# Altium PCB Insole_ver1.PcbDoc (part 2 of 2)
Units mil, origin at the board's own origin, x right, y up, seen from the top; angles counter-clockwise.
Board outline 8634.93 x 10258.5 mil, 2 copper layers (Top Layer, Bottom Layer); 254 components, 50 nets, 823 pads, 0 vias.
Unrouted connection lines stored in the file: 475.
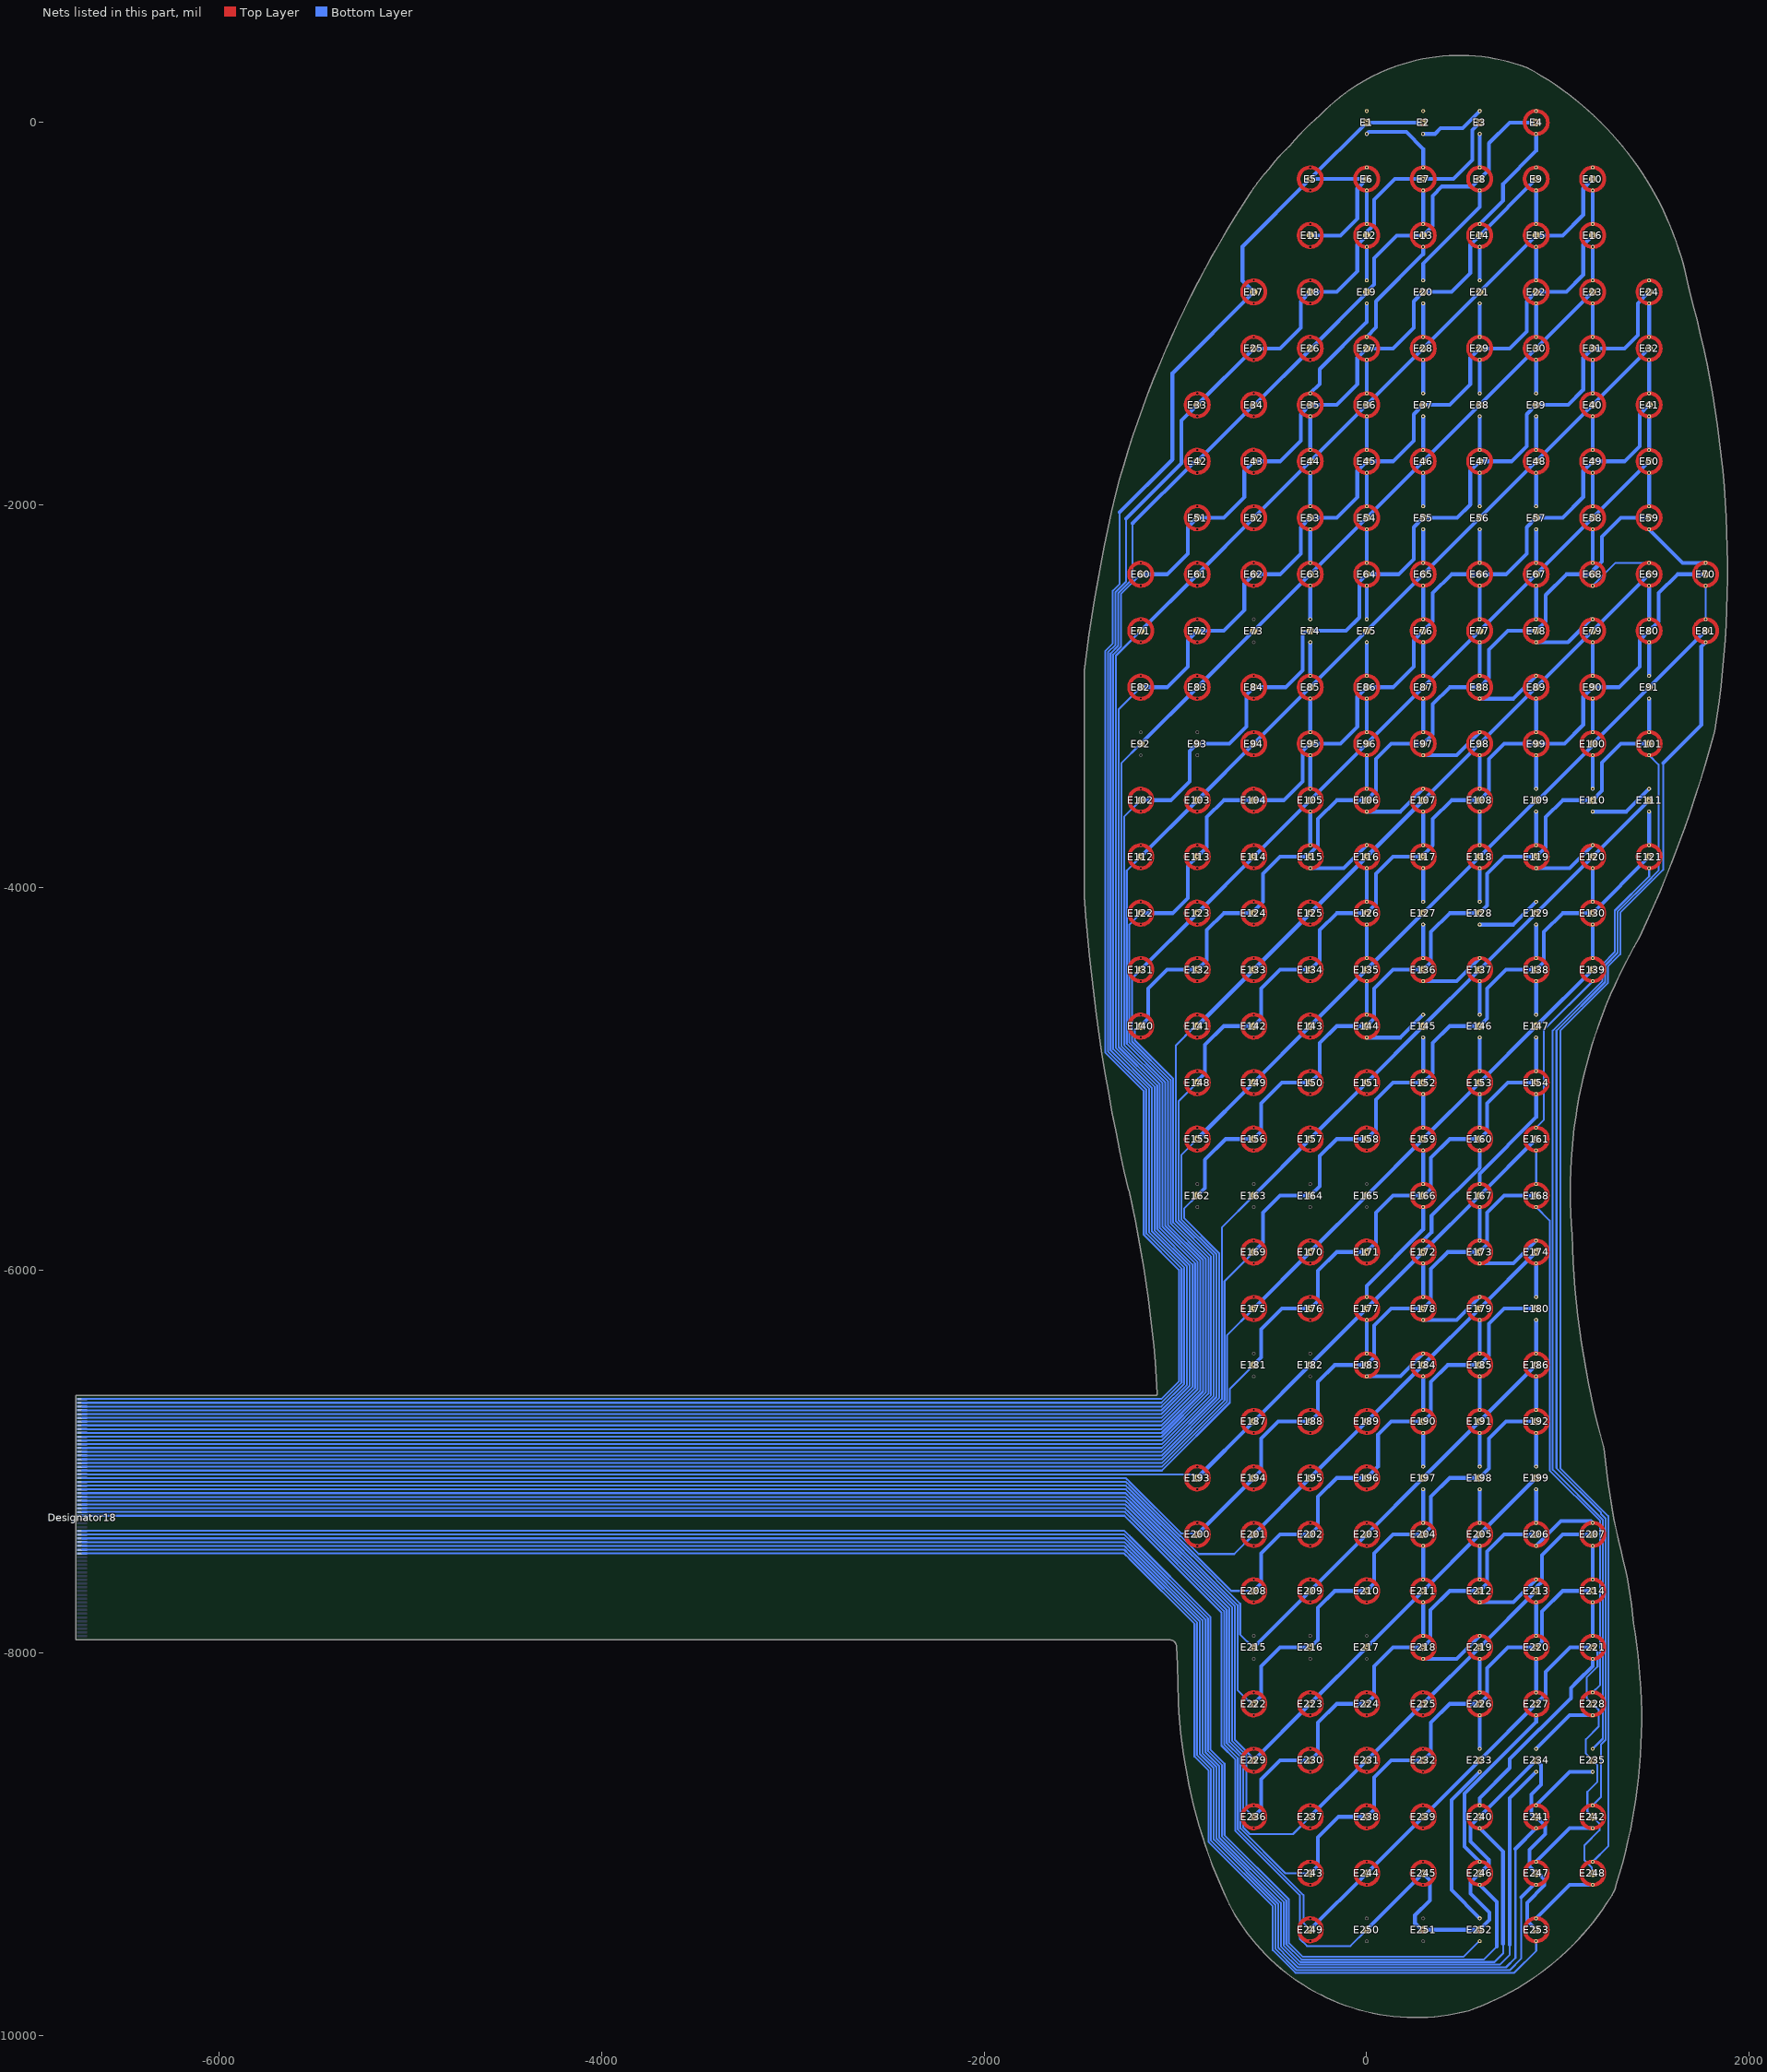
[diagram p2: the nets of this part, all layers, seen from the top]

## Nets (pads, with @x,y where several pads share a name; then routed paths per layer and width w, separated by ;. In a path a pad name is that pad's centre, name@x,y a point inside that pad or via, vN(x,y) a via of type N, cw(c..) or ccw(c..) an arc to the next point about the centre after c; other vN are vias at no path point) (continued)
Col4: Designator18.36 E6.1 E12.1 E19.1 E35.1 E44.1 E53.1 E63.1 E74.1 E85.1 E95.1 E105.1 E115.1 E116.1 E126.1 E135.1 E144.1 E145.1 E152.1 E159.1 E166.1 E177.1 E183.1 E184.1 E190.1 E197.1 E204.1 E211.1 E218.1 E219.1 E226.1 E233.1 E252.1 | length 16681
  Bottom Layer w10: Designator18.36@-6715.55,-7363.19 -4212.6,-7363.19 -1267.07,-7363.19 -1240.16,-7390.1 -1233.85,-7396.41 -816.38,-7813.88 -816.38,-8507.95 -743.67,-8580.66 -743.67,-8953.98 -406.39,-9291.25 -406.39,-9519.26 -335.99,-9589.66 507.09,-9589.66 587.93,-9508.82 E252.1@590.55,-9508.82
  Bottom Layer w19.68: E115.1@-295.28,-3898.58 -120,-3898.58 E116.1@0,-3778.58 ; E115.1@-295.28,-3778.58 E105.1@-295.28,-3603.31 ; E105.1@-295.28,-3483.31 E95.1@-295.28,-3308.03 ; E95.1@-295.28,-3188.03 E85.1@-295.28,-3012.76 ; E85.1@-295.28,-2892.76 E74.1@-295.28,-2717.48 ; E74.1@-295.28,-2597.48 E63.1@-295.28,-2422.2 ; E63.1@-295.28,-2302.2 E53.1@-295.28,-2126.93 ; E53.1@-295.28,-2006.93 E44.1@-295.28,-1831.65 ; E44.1@-295.28,-1711.65 E35.1@-295.28,-1536.38 ; E35.1@-295.28,-1416.38 -246.06,-1367.17 -246.06,-1289.37 0,-1043.31 E19.1@0,-945.83 ; E183.1@0,-6556.06 175.28,-6556.06 E184.1@295.28,-6436.06 ; E183.1@0,-6436.06 E177.1@0,-6260.79 ; E177.1@0,-6140.79 0,-6082.68 295.28,-5787.4 E166.1@295.28,-5670.24 ; E144.1@0,-4784.41 175.28,-4784.41 E145.1@295.28,-4664.41 ; E144.1@0,-4664.41 E135.1@0,-4489.13 ; E135.1@0,-4369.13 E126.1@0,-4193.86 ; E126.1@0,-4073.86 E116.1@0,-3898.58 ; E19.1@0,-825.83 E12.1@0,-650.55 ; E12.1@0,-530.55 E6.1@0,-355.28 ; E218.1@295.28,-8032.44 470.55,-8032.44 E219.1@590.55,-7912.44 ; E218.1@295.28,-7912.44 E211.1@295.28,-7737.17 ; E211.1@295.28,-7617.17 E204.1@295.28,-7441.89 ; E204.1@295.28,-7321.89 E197.1@295.28,-7146.61 ; E197.1@295.28,-7026.61 E190.1@295.28,-6851.34 ; E190.1@295.28,-6731.34 E184.1@295.28,-6556.06 ; E166.1@295.28,-5550.24 E159.1@295.28,-5374.96 ; E159.1@295.28,-5254.96 E152.1@295.28,-5079.69 ; E152.1@295.28,-4959.69 E145.1@295.28,-4784.41 ; E252.1@590.55,-9388.82 442.91,-9241.18 442.91,-8770.63 E233.1@590.55,-8622.99 ; E233.1@590.55,-8502.99 E226.1@590.55,-8327.72 ; E226.1@590.55,-8207.72 E219.1@590.55,-8032.44
Col5: Designator18.37 E1.1 E7.1 E13.1 E27.1 E36.1 E45.1 E54.1 E64.1 E75.1 E86.1 E96.1 E106.1 E107.1 E117.1 E127.1 E136.1 E137.1 E146.1 E153.1 E160.1 E172.1 E178.1 E179.1 E185.1 E191.1 E198.1 E205.1 E212.1 E213.1 E220.1 E227.1 E246.1 | length 17445.6
  Bottom Layer w10: Designator18.37@-6715.55,-7382.87 -4212.6,-7382.87 -1267.19,-7382.87 -1240.16,-7409.9 -1233.85,-7416.21 -830.38,-7819.68 -830.38,-8513.75 -757.67,-8586.46 -757.67,-8959.78 -420.72,-9296.73 -420.72,-9524.73 -341.79,-9603.66 612.87,-9603.66 679.13,-9537.4
  Bottom Layer w19.68: E106.1@0,-3603.31 175.28,-3603.31 E107.1@295.28,-3483.31 ; E106.1@0,-3483.31 E96.1@0,-3308.03 ; E96.1@0,-3188.03 E86.1@0,-3012.76 ; E86.1@0,-2892.76 E75.1@0,-2717.48 ; E75.1@0,-2597.48 E64.1@0,-2422.2 ; E64.1@0,-2302.2 E54.1@0,-2126.93 ; E54.1@0,-2006.93 E45.1@0,-1831.65 ; E45.1@0,-1711.65 E36.1@0,-1536.38 ; E36.1@0,-1416.38 E27.1@0,-1241.1 ; E27.1@0,-1121.1 49.21,-1071.89 49.21,-935.04 295.28,-688.98 E13.1@295.28,-650.55 ; E1.1@0,-60 10.79,-49.21 206.69,-49.21 295.28,-137.8 E7.1@295.28,-235.28 ; E178.1@295.28,-6260.79 470.55,-6260.79 E179.1@590.55,-6140.79 ; E178.1@295.28,-6140.79 E172.1@295.28,-5965.51 ; E172.1@295.28,-5845.51 338.58,-5802.2 338.58,-5716.54 590.55,-5464.57 E160.1@590.55,-5374.96 ; E136.1@295.28,-4489.13 470.55,-4489.13 E137.1@590.55,-4369.13 ; E136.1@295.28,-4369.13 E127.1@295.28,-4193.86 ; E127.1@295.28,-4073.86 E117.1@295.28,-3898.58 ; E117.1@295.28,-3778.58 E107.1@295.28,-3603.31 ; E13.1@295.28,-530.55 E7.1@295.28,-355.28 ; E246.1@590.55,-9213.54 679.13,-9302.13 679.13,-9537.4 ; E246.1@590.55,-9093.54 511.81,-9014.8 511.81,-8736.86 885.83,-8362.85 E227.1@885.83,-8327.72 ; E212.1@590.55,-7737.17 765.83,-7737.17 E213.1@885.83,-7617.17 ; E212.1@590.55,-7617.17 E205.1@590.55,-7441.89 ; E205.1@590.55,-7321.89 E198.1@590.55,-7146.61 ; E198.1@590.55,-7026.61 E191.1@590.55,-6851.34 ; E191.1@590.55,-6731.34 E185.1@590.55,-6556.06 ; E185.1@590.55,-6436.06 E179.1@590.55,-6260.79 ; E160.1@590.55,-5254.96 E153.1@590.55,-5079.69 ; E153.1@590.55,-4959.69 E146.1@590.55,-4784.41 ; E146.1@590.55,-4664.41 E137.1@590.55,-4489.13 ; E227.1@885.83,-8207.72 E220.1@885.83,-8032.44 ; E220.1@885.83,-7912.44 E213.1@885.83,-7737.17
Col6: Designator18.38 E2.1 E3.1 E8.1 E20.1 E28.1 E37.1 E46.1 E55.1 E65.1 E76.1 E87.1 E97.1 E98.1 E108.1 E118.1 E128.1 E129.1 E138.1 E147.1 E154.1 E167.1 E173.1 E174.1 E180.1 E186.1 E192.1 E199.1 E206.1 E207.1 E214.1 E221.1 E240.1 | length 17790.8
  Bottom Layer w10: Designator18.38@-6715.55,-7402.56 -6584.24,-7402.56 -4212.6,-7402.56 -1267.3,-7402.56 -1240.16,-7429.7 -1233.85,-7436.01 -844.38,-7825.48 -844.38,-8519.55 -771.67,-8592.26 -771.67,-8965.58 -434.72,-9302.53 -434.72,-9530.53 -347.59,-9617.66 667.77,-9617.66 712.6,-9572.83 712.6,-9521.65 ; 1062.99,-7313.94 1062.99,-7312.99
  Bottom Layer w19.68: E97.1@295.28,-3308.03 470.55,-3308.03 E98.1@590.55,-3188.03 ; E97.1@295.28,-3188.03 E87.1@295.28,-3012.76 ; E87.1@295.28,-2892.76 E76.1@295.28,-2717.48 ; E76.1@295.28,-2597.48 E65.1@295.28,-2422.2 ; E65.1@295.28,-2302.2 E55.1@295.28,-2126.93 ; E55.1@295.28,-2006.93 E46.1@295.28,-1831.65 ; E46.1@295.28,-1711.65 E37.1@295.28,-1536.38 ; E37.1@295.28,-1416.38 E28.1@295.28,-1241.1 ; E28.1@295.28,-1121.1 E20.1@295.28,-945.83 ; E20.1@295.28,-825.83 295.28,-738.19 590.55,-442.91 E8.1@590.55,-355.28 ; E2.1@295.28,-60 356.22,-60 386.69,-29.53 501.02,-29.53 E3.1@590.55,60 ; E240.1@590.55,-8918.27 712.6,-9040.31 712.6,-9521.65 ; E240.1@590.55,-8798.27 590.55,-8759.84 747.6,-8602.79 747.6,-8555.55 901.57,-8401.57 904.81,-8401.57 1067.62,-8238.77 1067.62,-8184.35 1102.36,-8149.61 1181.1,-8070.87 E221.1@1181.1,-8032.44 ; E173.1@590.55,-5965.51 765.83,-5965.51 E174.1@885.83,-5845.51 ; E173.1@590.55,-5845.51 E167.1@590.55,-5670.24 ; E167.1@590.55,-5550.24 590.55,-5496.06 885.83,-5200.79 E154.1@885.83,-5079.69 ; E128.1@590.55,-4193.86 765.83,-4193.86 E129.1@885.83,-4073.86 ; E128.1@590.55,-4073.86 E118.1@590.55,-3898.58 ; E118.1@590.55,-3778.58 E108.1@590.55,-3603.31 ; E108.1@590.55,-3483.31 E98.1@590.55,-3308.03 ; E8.1@590.55,-235.28 E3.1@590.55,-60 ; E206.1@885.83,-7441.89 1014.72,-7312.99 1062.99,-7312.99 1172.2,-7312.99 E207.1@1181.1,-7321.89 ; E206.1@885.83,-7321.89 E199.1@885.83,-7146.61 ; E199.1@885.83,-7026.61 E192.1@885.83,-6851.34 ; E192.1@885.83,-6731.34 E186.1@885.83,-6556.06 ; E186.1@885.83,-6436.06 E180.1@885.83,-6260.79 ; E180.1@885.83,-6140.79 E174.1@885.83,-5965.51 ; E154.1@885.83,-4959.69 E147.1@885.83,-4784.41 ; E147.1@885.83,-4664.41 E138.1@885.83,-4489.13 ; E138.1@885.83,-4369.13 E129.1@885.83,-4193.86 ; E221.1@1181.1,-7912.44 E214.1@1181.1,-7737.17 ; E214.1@1181.1,-7617.17 E207.1@1181.1,-7441.89
Col7: Designator18.39 E4.1 E14.1 E21.1 E29.1 E38.1 E47.1 E56.1 E66.1 E77.1 E88.1 E89.1 E99.1 E109.1 E119.1 E120.1 E130.1 E139.1 E161.1 E168.1 E228.1 E234.1 | length 17857.8
  Bottom Layer w10: Designator18.39@-6715.55,-7422.24 -4212.6,-7422.24 -1267.42,-7422.24 -1240.16,-7449.5 -1233.85,-7455.81 -858.38,-7831.28 -858.38,-8525.35 -785.67,-8598.06 -785.67,-8971.37 -448.8,-9308.24 -448.8,-9536.25 -353.39,-9631.66 695.77,-9631.66 748.03,-9579.4 748.03,-9527.56 ; E168.1@885.83,-5670.24 956.69,-5741.1 956.69,-7047.24 1220.47,-7311.02 1220.47,-8168.35 E228.1@1181.1,-8207.72 ; E168.1@885.83,-5550.24 E161.1@885.83,-5374.96 ; E161.1@885.83,-5254.96 925.2,-5215.59 925.2,-4745.04 E139.1@1181.1,-4489.13
  Bottom Layer w19.68: E88.1@590.55,-3012.76 765.83,-3012.76 E89.1@885.83,-2892.76 ; E88.1@590.55,-2892.76 E77.1@590.55,-2717.48 ; E77.1@590.55,-2597.48 E66.1@590.55,-2422.2 ; E66.1@590.55,-2302.2 E56.1@590.55,-2126.93 ; E56.1@590.55,-2006.93 E47.1@590.55,-1831.65 ; E47.1@590.55,-1711.65 E38.1@590.55,-1536.38 ; E38.1@590.55,-1416.38 E29.1@590.55,-1241.1 ; E29.1@590.55,-1121.1 E21.1@590.55,-945.83 ; E21.1@590.55,-825.83 E14.1@590.55,-650.55 ; E14.1@590.55,-530.55 712.6,-408.5 712.6,-320.87 885.83,-147.64 E4.1@885.83,-60 ; 748.03,-9527.56 748.03,-8760.79 E234.1@885.83,-8622.99 ; E234.1@885.83,-8502.99 1061.1,-8327.72 E228.1@1181.1,-8327.72 ; E119.1@885.83,-3898.58 1061.1,-3898.58 E120.1@1181.1,-3778.58 ; E119.1@885.83,-3778.58 E109.1@885.83,-3603.31 ; E109.1@885.83,-3483.31 E99.1@885.83,-3308.03 ; E99.1@885.83,-3188.03 E89.1@885.83,-3012.76 ; E139.1@1181.1,-4369.13 E130.1@1181.1,-4193.86 ; E130.1@1181.1,-4073.86 E120.1@1181.1,-3898.58
Col8: Designator18.40 E9.1 E15.1 E22.1 E30.1 E39.1 E48.1 E57.1 E67.1 E78.1 E79.1 E90.1 E100.1 E110.1 E111.1 E121.1 E235.1 E241.1 | length 18014
  Bottom Layer w10: Designator18.40@-6715.55,-7441.93 -4212.6,-7441.93 -1267.53,-7441.93 -1240.16,-7469.3 -1233.85,-7475.61 -872.38,-7837.08 -872.38,-8531.15 -799.67,-8603.86 -799.67,-8977.17 -462.8,-9314.04 -462.8,-9542.04 -436.99,-9567.86 -436.99,-9569.57 -360.91,-9645.66 728.13,-9645.66 777.56,-9596.23 777.56,-9026.54 ; E235.1@1181.1,-8502.99 1234.47,-8449.62 1234.47,-7305.22 972.44,-7043.19 972.44,-4748.03 1232.28,-4488.19 1232.28,-4401.46 1297.02,-4336.72 1297.02,-4120.3 1476.38,-3940.94 E121.1@1476.38,-3898.58
  Bottom Layer w19.68: 777.56,-9026.54 E241.1@885.83,-8918.27 ; E241.1@885.83,-8798.27 1061.1,-8622.99 E235.1@1181.1,-8622.99 ; E78.1@885.83,-2717.48 1052.2,-2717.48 1172.2,-2597.48 E79.1@1181.1,-2597.48 ; E78.1@885.83,-2597.48 E67.1@885.83,-2422.2 ; E67.1@885.83,-2302.2 E57.1@885.83,-2126.93 ; E57.1@885.83,-2006.93 E48.1@885.83,-1831.65 ; E48.1@885.83,-1711.65 E39.1@885.83,-1536.38 ; E39.1@885.83,-1416.38 E30.1@885.83,-1241.1 ; E30.1@885.83,-1121.1 E22.1@885.83,-945.83 ; E22.1@885.83,-825.83 E15.1@885.83,-650.55 ; E15.1@885.83,-530.55 E9.1@885.83,-355.28 ; E110.1@1181.1,-3603.31 1356.38,-3603.31 E111.1@1476.38,-3483.31 ; E110.1@1181.1,-3483.31 E100.1@1181.1,-3308.03 ; E100.1@1181.1,-3188.03 E90.1@1181.1,-3012.76 ; E90.1@1181.1,-2892.76 E79.1@1181.1,-2717.48 ; E121.1@1476.38,-3778.58 E111.1@1476.38,-3603.31
Col9: Designator18.41 E10.1 E16.1 E23.1 E31.1 E40.1 E49.1 E58.1 E68.1 E69.1 E80.1 E91.1 E101.1 E242.1 E247.1 | length 17975.5
  Bottom Layer w10: Designator18.41@-6715.55,-7461.61 -4212.6,-7461.61 -1267.64,-7461.61 -1240.16,-7489.1 -1233.85,-7495.41 -886.38,-7842.88 -886.38,-8536.95 -813.67,-8609.66 -813.67,-8982.97 -476.8,-9319.84 -476.8,-9549.56 -366.7,-9659.66 747.82,-9659.66 807.09,-9600.39 807.09,-9279.53 ; 871.88,-9214.73 884.64,-9214.73 E247.1@885.83,-9213.54 ; E242.1@1181.1,-8798.27 1224.41,-8754.96 1224.41,-8479.48 1248.47,-8455.42 1248.47,-7299.43 1224.41,-7275.36 1224.41,-7267.72 992.13,-7035.43 992.13,-4748.15 1246.28,-4493.99 1246.28,-4407.26 1311.02,-4342.52 1311.02,-4126.1 1490.38,-3946.74 1490.38,-3946.63 1525.37,-3911.64 1525.37,-3357.02 E101.1@1476.38,-3308.03 ; E68.1@1181.1,-2422.2 1301.1,-2302.2 E69.1@1476.38,-2302.2
  Bottom Layer w19.68: 807.09,-9279.53 871.88,-9214.73 ; E247.1@885.83,-9093.54 1061.1,-8918.27 E242.1@1181.1,-8918.27 ; E68.1@1181.1,-2302.2 E58.1@1181.1,-2126.93 ; E58.1@1181.1,-2006.93 E49.1@1181.1,-1831.65 ; E49.1@1181.1,-1711.65 E40.1@1181.1,-1536.38 ; E40.1@1181.1,-1416.38 E31.1@1181.1,-1241.1 ; E31.1@1181.1,-1121.1 E23.1@1181.1,-945.83 ; E23.1@1181.1,-825.83 E16.1@1181.1,-650.55 ; E16.1@1181.1,-530.55 E10.1@1181.1,-355.28 ; E101.1@1476.38,-3188.03 E91.1@1476.38,-3012.76 ; E91.1@1476.38,-2892.76 E80.1@1476.38,-2717.48 ; E80.1@1476.38,-2597.48 E69.1@1476.38,-2422.2
Col10: Designator18.42 E24.1 E32.1 E41.1 E50.1 E59.1 E70.1 E81.1 E248.1 E253.1 | length 17807.5
  Bottom Layer w10: Designator18.42@-6715.55,-7481.3 -4212.6,-7481.3 -1267.76,-7481.3 -1240.16,-7508.9 -1233.85,-7515.21 -900.38,-7848.68 -900.38,-8542.74 -827.67,-8615.46 -827.67,-8988.77 -490.8,-9325.64 -490.8,-9555.36 -372.5,-9673.66 771.22,-9673.66 885.83,-9559.06 E253.1@885.83,-9508.82 ; E248.1@1181.1,-9093.54 1262.47,-9012.17 1262.47,-7285.98 1011.81,-7035.32 1011.81,-4748.26 1260.28,-4499.79 1260.28,-4413.06 1325.02,-4348.32 1325.02,-4131.9 1549.21,-3907.71 1549.21,-3348.43 ; E81.1@1771.65,-2597.48 E70.1@1771.65,-2422.2
  Bottom Layer w19.68: E253.1@885.83,-9388.82 1061.1,-9213.54 E248.1@1181.1,-9213.54 ; E59.1@1476.38,-2126.93 1651.65,-2302.2 E70.1@1771.65,-2302.2 ; E59.1@1476.38,-2006.93 E50.1@1476.38,-1831.65 ; E50.1@1476.38,-1711.65 E41.1@1476.38,-1536.38 ; E41.1@1476.38,-1416.38 E32.1@1476.38,-1241.1 ; E32.1@1476.38,-1121.1 E24.1@1476.38,-945.83 ; 1549.21,-3348.43 1749.02,-3148.62 1749.02,-2740.12 E81.1@1771.65,-2717.48
Col11: 
Col12: 
Col13: 
Col14: 
Col15: 
Col16: 
Col17: 
Col18: 
Row1: Designator18.1 E1.0 E2.0 E5.0 E6.0 E11.0 E17.0 | length 14229.3
  Bottom Layer w10: Designator18.1@-6715.55,-6674.21 -4212.6,-6674.21 -1073.77,-6674.21 -981.65,-6582.09 -981.65,-5998.66 -1165.35,-5814.96 -1165.35,-5064.24 -1367.02,-4862.57 -1367.02,-4857.39 -1367.02,-2764.21 -1327.21,-2724.39 -1327.21,-2448.92 -1291.34,-2413.04 -1291.34,-2037.4
  Bottom Layer w19.68: -1291.34,-2037.4 -1015.75,-1761.81 -1015.75,-1311.02 E17.0@-590.55,-885.83 -649.61,-826.77 -649.61,-649.61 E5.0@-295.28,-295.28 E1.0@0,0 E2.0@295.28,0 ; E11.0@-295.28,-590.55 -137.8,-590.55 -49.21,-501.97 -49.21,-344.49 E6.0@0,-295.28
  Bottom Layer w20: E5.0@-295.28,-295.28 E6.0@0,-295.28
Row2: Designator18.2 E3.0 E7.0 E12.0 E18.0 E25.0 E33.0 | length 13679.3
  Bottom Layer w10: Designator18.2@-6715.55,-6693.9 -4212.6,-6693.9 -1240.16,-6693.9 -1233.85,-6693.9 -1073.5,-6693.9 -967.65,-6588.05 -967.65,-5992.86 -1151.35,-5809.16 -1151.35,-5058.45 -1353.02,-4856.78 -1353.02,-4851.7 -1353.02,-2770.01 -1313.21,-2730.19 -1313.21,-2454.72 -1257.87,-2399.38 -1257.87,-2071.85
  Bottom Layer w19.68: -1257.87,-2071.85 -968.5,-1782.48 -968.5,-1559.06 E33.0@-885.83,-1476.38 E25.0@-590.55,-1181.1 -452.76,-1181.1 -344.49,-1072.83 -344.49,-935.04 E18.0@-295.28,-885.83 -157.48,-885.83 -49.21,-777.56 -49.21,-639.76 E12.0@0,-590.55 ; E12.0@3.77,-586.78 3.77,-568.77 39.37,-533.16 39.37,-403.54 147.64,-295.28 E7.0@295.28,-295.28 452.76,-295.28 551.18,-196.85 551.18,-39.37 E3.0@590.55,0
Row3: Designator18.3 E4.0 E8.0 E13.0 E19.0 E26.0 E34.0 E42.0 | length 13750.7
  Bottom Layer w10: Designator18.3@-6715.55,-6713.58 -4212.6,-6713.58 -1240.16,-6713.58 -1233.85,-6713.58 -1073.39,-6713.58 -953.65,-6593.85 -953.65,-5987.06 -1137.35,-5803.36 -1137.35,-5052.65 -1339.02,-4850.98 -1339.02,-4842.08 -1339.02,-2775.8 -1299.21,-2735.99 -1299.21,-2460.52 -1223.43,-2384.73 -1223.43,-2096.46 ; E42.0@-904.24,-1777.27 E42.0@-891.45,-1777.27
  Bottom Layer w19.68: -1223.43,-2096.46 E42.0@-904.24,-1777.27 ; E42.0@-893.58,-1779.41 E34.0@-590.55,-1476.38 ; E34.0@-588.05,-1478.88 -292.78,-1183.6 E19.0@2.5,-888.33 ; E19.0@0,-885.83 39.37,-846.46 39.37,-708.66 157.48,-590.55 E13.0@295.28,-590.55 344.49,-541.34 344.49,-383.86 393.7,-334.65 551.18,-334.65 E8.0@590.55,-295.28 639.76,-246.06 639.76,-108.27 748.03,0 E4.0@885.83,0
Row4: Designator18.4 E9.0 E14.0 E20.0 E27.0 E35.0 E43.0 E51.0 E60.0 | length 13701.1
  Bottom Layer w10: Designator18.4@-6715.55,-6733.27 -6593.5,-6733.27 -4212.6,-6733.27 -1240.16,-6733.27 -1233.85,-6733.27 -1073.27,-6733.27 -939.65,-6599.65 -939.65,-5981.26 -1123.35,-5797.56 -1123.35,-5046.85 -1325.02,-4845.18 -1325.02,-2781.6 -1285.21,-2741.79 -1285.21,-2466.31 E60.0@-1181.1,-2362.2
  Bottom Layer w19.68: E60.0@-1181.1,-2362.2 -1043.31,-2362.2 -935.04,-2253.94 -935.04,-2116.14 E51.0@-885.83,-2066.93 -748.03,-2066.93 -639.76,-1958.66 -639.76,-1820.87 E43.0@-590.55,-1771.65 -452.76,-1771.65 -344.49,-1663.39 -344.49,-1525.59 E35.0@-295.28,-1476.38 -157.48,-1476.38 -49.21,-1368.11 -49.21,-1230.32 E27.0@0,-1181.1 137.8,-1181.1 246.06,-1072.83 246.06,-935.04 E20.0@295.28,-885.83 442.91,-885.83 541.34,-787.4 541.34,-639.76 E14.0@590.55,-590.55 E9.0@885.83,-295.28
Row5: Designator18.5 E10.0 E15.0 E21.0 E28.0 E36.0 E44.0 E52.0 E61.0 E71.0 | length 13433.8
  Bottom Layer w10: Designator18.5@-6715.55,-6752.95 -6593.5,-6752.95 -4212.6,-6752.95 -1240.16,-6752.95 -1233.85,-6752.95 -1073.16,-6752.95 -925.65,-6605.44 -925.65,-5975.47 -1109.35,-5791.77 -1109.35,-5041.05 -1310.6,-4839.8 -1310.6,-4835.07 -1311.02,-4834.65 -1311.02,-2787.4 E71.0@-1181.1,-2657.48 ; 871.83,-604.55 E15.0@891.63,-604.55
  Bottom Layer w19.68: E71.0@-1181.1,-2657.48 E61.0@-885.83,-2362.2 E52.0@-590.55,-2066.93 E44.0@-295.28,-1771.65 E36.0@0,-1476.38 E28.0@295.28,-1181.1 871.83,-604.55 ; E15.0@885.83,-590.55 1023.62,-590.55 1131.89,-482.28 1131.89,-344.49 E10.0@1181.1,-295.28
Row6: Designator18.6 E16.0 E22.0 E29.0 E37.0 E45.0 E53.0 E62.0 E72.0 E82.0 | length 13746
  Bottom Layer w10: Designator18.6@-6715.55,-6772.64 -6593.5,-6772.64 -4212.6,-6772.64 -1240.16,-6772.64 -1233.85,-6772.64 -1073.05,-6772.64 -911.65,-6611.24 -911.65,-5969.67 -1095.35,-5785.97 -1095.35,-5035.25 -1296.6,-4834.01 -1296.6,-3343.73 -1296.6,-3068.25 E82.0@-1181.1,-2952.76
  Bottom Layer w19.68: E82.0@-1181.1,-2952.76 -1043.31,-2952.76 -935.04,-2844.49 -935.04,-2706.69 E72.0@-885.83,-2657.48 -748.03,-2657.48 -639.76,-2549.21 -639.76,-2411.42 E62.0@-590.55,-2362.2 -452.76,-2362.2 -344.49,-2253.94 -344.49,-2116.14 E53.0@-295.28,-2066.93 -157.48,-2066.93 -49.21,-1958.66 -49.21,-1820.87 E45.0@0,-1771.65 137.8,-1771.65 246.06,-1663.39 246.06,-1525.59 E37.0@295.28,-1476.38 433.07,-1476.38 541.34,-1368.11 541.34,-1230.32 E29.0@590.55,-1181.1 748.03,-1181.1 836.61,-1092.52 836.61,-935.04 E22.0@885.83,-885.83 1043.31,-885.83 1131.89,-797.24 1131.89,-639.76 E16.0@1181.1,-590.55
Row7: Designator18.7 E23.0 E30.0 E38.0 E46.0 E54.0 E63.0 E73.0 E83.0 E92.0 | length 12801.7
  Bottom Layer w10: Designator18.7@-6715.55,-6792.32 -4212.6,-6792.32 -1240.16,-6792.32 -1233.85,-6792.32 -1072.93,-6792.32 -897.65,-6617.04 -897.65,-5963.87 -1081.35,-5780.17 -1081.35,-5029.45 -1282.6,-4828.21 -1282.6,-4175.96 -1282.6,-3349.53 E92.0@-1181.1,-3248.03
  Bottom Layer w19.68: E92.0@-1181.1,-3248.03 E83.0@-885.83,-2952.76 E73.0@-590.55,-2657.48 E63.0@-295.28,-2362.2 E54.0@0,-2066.93 E46.0@295.28,-1771.65 E23.0@1181.1,-885.83
Row8: Designator18.8 E24.0 E31.0 E39.0 E47.0 E55.0 E64.0 E74.0 E84.0 E93.0 E102.0 | length 13848.9
  Bottom Layer w10: Designator18.8@-6715.55,-6812.01 -4212.6,-6812.01 -1240.16,-6812.01 -1233.85,-6812.01 -1072.82,-6812.01 -883.65,-6622.84 -883.65,-5958.07 -1067.35,-5774.37 -1067.35,-5023.65 -1268.6,-4822.41 -1268.6,-4181.76 -1268.6,-3630.8 E102.0@-1181.1,-3543.31
  Bottom Layer w19.68: E102.0@-1181.1,-3543.31 -1023.62,-3543.31 -925.2,-3444.88 -925.2,-3287.4 E93.0@-885.83,-3248.03 -718.5,-3248.03 -629.92,-3159.45 -629.92,-2992.13 E84.0@-590.55,-2952.76 -423.23,-2952.76 -334.65,-2864.17 -334.65,-2677.17 -318.73,-2661.25 -299.04,-2661.25 E74.0@-295.28,-2657.48 -108.27,-2657.48 -39.37,-2588.58 -39.37,-2401.57 E64.0@0,-2362.2 167.32,-2362.2 246.06,-2283.46 246.06,-2116.14 E55.0@295.28,-2066.93 472.44,-2066.93 541.34,-1998.03 541.34,-1820.87 E47.0@590.55,-1771.65 757.87,-1771.65 836.61,-1692.91 836.61,-1525.59 E39.0@885.83,-1476.38 1053.15,-1476.38 1131.89,-1397.64 1131.89,-1230.32 E31.0@1181.1,-1181.1 1348.43,-1181.1 1417.32,-1112.2 1417.32,-944.88 E24.0@1476.38,-885.83
Row9: Designator18.9 E32.0 E40.0 E48.0 E56.0 E65.0 E75.0 E85.0 E94.0 E103.0 E112.0 | length 12668.2
  Bottom Layer w10: Designator18.9@-6715.55,-6831.69 -4212.6,-6831.69 -1240.16,-6831.69 -1233.85,-6831.69 -1072.71,-6831.69 -869.65,-6628.64 -869.65,-5952.27 -1053.35,-5768.57 -1053.35,-5017.85 -1254.6,-4816.61 -1254.6,-4187.56 -1254.6,-3912.08 E112.0@-1181.1,-3838.58
  Bottom Layer w19.68: E112.0@-1181.1,-3838.58 E103.0@-885.83,-3543.31 E94.0@-590.55,-3248.03 E85.0@-295.28,-2952.76 E75.0@0,-2657.48 E65.0@295.28,-2362.2 E56.0@590.55,-2066.93 E48.0@885.83,-1771.65 E32.0@1476.38,-1181.1
Row10: Designator18.10 E41.0 E49.0 E57.0 E66.0 E76.0 E86.0 E95.0 E104.0 E113.0 E122.0 | length 13194.1
  Bottom Layer w10: Designator18.10@-6715.55,-6851.38 -4212.6,-6851.38 -1240.16,-6851.38 -1233.85,-6851.38 -1072.59,-6851.38 -855.65,-6634.44 -855.65,-5946.47 -1039.35,-5762.77 -1039.35,-5012.05 -1240.6,-4810.81 -1240.6,-4193.35 E122.0@-1181.1,-4133.86
  Bottom Layer w19.68: E122.0@-1181.1,-4133.86 -1013.78,-4133.86 -935.04,-4055.12 -935.04,-3887.8 E113.0@-885.83,-3838.58 -836.61,-3789.37 -836.61,-3631.89 -748.03,-3543.31 E104.0@-590.55,-3543.31 -433.07,-3543.31 -334.65,-3444.88 -334.65,-3287.4 E95.0@-295.28,-3248.03 -137.8,-3248.03 -49.21,-3159.45 -49.21,-3001.97 E86.0@0,-2952.76 137.8,-2952.76 246.06,-2844.49 246.06,-2706.69 E76.0@295.28,-2657.48 344.49,-2608.27 344.49,-2460.63 442.91,-2362.2 E66.0@590.55,-2362.2 728.35,-2362.2 836.61,-2253.94 836.61,-2116.14 E57.0@885.83,-2066.93 1023.62,-2066.93 1131.89,-1958.66 1131.89,-1820.87 E49.0@1181.1,-1771.65 1348.43,-1771.65 1427.17,-1692.91 1427.17,-1525.59 E41.0@1476.38,-1476.38
Row11: Designator18.11 E50.0 E58.0 E67.0 E77.0 E87.0 E96.0 E105.0 E114.0 E123.0 E131.0 | length 12117.2
  Bottom Layer w10: Designator18.11@-6715.55,-6871.06 -4212.6,-6871.06 -1240.16,-6871.06 -1233.85,-6871.06 -1072.48,-6871.06 -841.65,-6640.24 -841.65,-5940.67 -1025.35,-5756.97 -1025.35,-5006.26 -1226.6,-4805.01 -1226.6,-4474.63 E131.0@-1181.1,-4429.13
  Bottom Layer w19.68: E131.0@-1181.1,-4429.13 E123.0@-885.83,-4133.86 E114.0@-590.55,-3838.58 E105.0@-295.28,-3543.31 E96.0@0,-3248.03 E87.0@295.28,-2952.76 E77.0@590.55,-2657.48 E67.0@885.83,-2362.2 E58.0@1181.1,-2066.93 E50.0@1476.38,-1771.65
Row12: Designator18.12 E59.0 E68.0 E78.0 E88.0 E97.0 E106.0 E115.0 E124.0 E132.0 E140.0 | length 12661.5
  Bottom Layer w10: Designator18.12@-6715.55,-6890.75 -4212.6,-6890.75 -1240.16,-6890.75 -1233.85,-6890.75 -1072.36,-6890.75 -827.65,-6646.04 -827.65,-5934.87 -1011.35,-5751.17 -1011.35,-5000.46 -1212.6,-4799.21 -1212.6,-4744.09 -1201.53,-4733.03 -1197.67,-4733.03 -1189.05,-4724.41 E140.0@-1181.1,-4724.41
  Bottom Layer w19.68: E140.0@-1181.1,-4724.41 -1141.73,-4685.04 -1141.73,-4527.56 -1043.31,-4429.13 E132.0@-885.83,-4429.13 -836.61,-4379.92 -836.61,-4222.44 -748.03,-4133.86 E124.0@-590.55,-4133.86 -590.55,-4128.53 -580.71,-4118.69 -580.71,-4114.17 -541.34,-4074.8 -541.34,-3927.17 -452.76,-3838.58 E115.0@-295.28,-3838.58 -291.51,-3834.82 -291.51,-3816.8 -255.91,-3781.19 -255.91,-3641.73 -157.48,-3543.31 E106.0@0,-3543.31 49.21,-3494.09 49.21,-3326.77 127.95,-3248.03 E97.0@295.28,-3248.03 344.49,-3198.82 344.49,-3041.34 433.07,-2952.76 E88.0@590.55,-2952.76 639.76,-2903.54 639.76,-2755.91 738.19,-2657.48 E78.0@885.83,-2657.48 935.04,-2608.27 935.04,-2470.47 1043.31,-2362.2 E68.0@1181.1,-2362.2 1184.87,-2358.44 1184.87,-2340.42 1230.31,-2294.97 1230.31,-2165.35 1328.74,-2066.93 E59.0@1476.38,-2066.93
Row13: Designator18.13 E69.0 E79.0 E89.0 E98.0 E107.0 E116.0 E125.0 E133.0 E141.0 | length 11406.3
  Bottom Layer w10: Designator18.13@-6715.55,-6910.43 -4212.6,-6910.43 -1240.16,-6910.43 -1233.85,-6910.43 -1072.25,-6910.43 -813.65,-6651.84 -813.65,-5929.08 -997.35,-5745.37 -997.35,-4824.13 -906.26,-4733.03 -902.39,-4733.03 -893.77,-4724.41 E141.0@-885.83,-4724.41
  Bottom Layer w19.68: E141.0@-885.83,-4724.41 E69.0@1476.38,-2362.2
Row14: Designator18.14 E70.0 E80.0 E90.0 E99.0 E108.0 E117.0 E126.0 E134.0 E142.0 E148.0 | length 12348.6
  Bottom Layer w10: Designator18.14@-6715.55,-6930.12 -4212.6,-6930.12 -1240.16,-6930.12 -1233.85,-6930.12 -1072.14,-6930.12 -799.65,-6657.63 -799.65,-5923.28 -983.35,-5739.58 -983.35,-5117.21 E148.0@-885.83,-5019.69
  Bottom Layer w19.68: E148.0@-885.83,-5019.69 -885.83,-5014.36 -875.98,-5004.52 -875.98,-5000 -846.46,-4970.47 -846.46,-4822.83 -748.03,-4724.41 E142.0@-590.55,-4724.41 -551.18,-4685.04 -551.18,-4527.56 -452.76,-4429.13 E134.0@-295.28,-4429.13 -246.06,-4379.92 -246.06,-4222.44 -157.48,-4133.86 E126.0@0,-4133.86 49.21,-4084.65 49.21,-3927.17 137.8,-3838.58 E117.0@295.28,-3838.58 295.28,-3833.26 305.12,-3823.41 305.12,-3818.9 344.49,-3779.53 344.49,-3641.73 442.91,-3543.31 E108.0@590.55,-3543.31 639.76,-3494.09 639.76,-3326.77 718.5,-3248.03 E99.0@885.83,-3248.03 1033.46,-3248.03 1131.89,-3149.61 1131.89,-3001.97 E90.0@1181.1,-2952.76 1318.9,-2952.76 1427.17,-2844.49 1427.17,-2706.69 E80.0@1476.38,-2657.48 1525.59,-2608.27 1525.59,-2460.63 1624.02,-2362.2 E70.0@1771.65,-2362.2
Row15: Designator18.15 E81.0 E91.0 E100.0 E109.0 E118.0 E127.0 E135.0 E143.0 E149.0 E155.0 | length 11271.7
  Bottom Layer w10: Designator18.15@-6715.55,-6949.8 -4212.6,-6949.8 -1240.16,-6949.8 -1233.85,-6949.8 -1072.02,-6949.8 -785.65,-6663.43 -785.65,-5917.48 -969.35,-5733.78 -969.35,-5398.49 E155.0@-885.83,-5314.96
  Bottom Layer w19.68: E155.0@-885.83,-5314.96 E149.0@-590.55,-5019.69 E143.0@-295.28,-4724.41 E109.0@885.83,-3543.31 891.15,-3543.31 901,-3533.46 905.51,-3533.46 1177.34,-3261.64 1177.34,-3251.8 E100.0@1181.1,-3248.03 E81.0@1771.65,-2657.48
Row16: Designator18.16 E101.0 E110.0 E119.0 E128.0 E136.0 E144.0 E150.0 E156.0 E162.0 | length 11294
  Bottom Layer w10: Designator18.16@-6715.55,-6969.49 -4212.6,-6969.49 -1240.16,-6969.49 -1233.85,-6969.49 -1071.91,-6969.49 -771.65,-6669.23 -771.65,-5911.68 -955.35,-5727.98 -955.35,-5679.76 E162.0@-885.83,-5610.24
  Bottom Layer w19.68: E162.0@-885.83,-5610.24 -846.46,-5570.87 -846.46,-5423.23 -738.19,-5314.96 E156.0@-590.55,-5314.96 -551.18,-5275.59 -551.18,-5127.95 -442.91,-5019.69 E150.0@-295.28,-5019.69 -246.06,-4970.47 -246.06,-4812.99 -157.48,-4724.41 E144.0@0,-4724.41 ; E144.0@3.77,-4720.64 39.37,-4685.04 39.37,-4527.56 137.8,-4429.13 E136.0@295.28,-4429.13 334.65,-4389.76 334.65,-4232.28 433.07,-4133.86 E128.0@590.55,-4133.86 629.92,-4094.49 629.92,-3927.17 718.5,-3838.58 E119.0@885.83,-3838.58 935.04,-3789.37 935.04,-3631.89 1023.62,-3543.31 E110.0@1181.1,-3543.31 1230.31,-3494.09 1230.31,-3346.46 1328.74,-3248.03 E101.0@1476.38,-3248.03
Row17: Designator18.17 E111.0 E120.0 E129.0 E137.0 E145.0 E151.0 E157.0 E163.0 | length 10145.1
  Bottom Layer w10: Designator18.17@-6715.55,-6989.17 -4212.6,-6989.17 -1240.16,-6989.17 -1233.85,-6989.17 -1071.8,-6989.17 -757.65,-6675.03 -757.65,-5777.34 E163.0@-590.55,-5610.24
  Bottom Layer w19.68: E163.0@-590.55,-5610.24 E157.0@-295.28,-5314.96 E151.0@0,-5019.69 E145.0@295.28,-4724.41 E137.0@590.55,-4429.13 E129.0@885.83,-4133.86 E120.0@1181.1,-3838.58 E111.0@1476.38,-3543.31
Row18: Designator18.18 E121.0 E130.0 E138.0 E146.0 E152.0 E158.0 E164.0 E169.0 | length 10417.8
  Bottom Layer w10: Designator18.18@-6715.55,-7008.86 -6511.65,-7008.86 -4212.6,-7008.86 -1240.16,-7008.86 -1233.85,-7008.86 -1071.68,-7008.86 -743.65,-6680.83 -743.65,-6058.61 E169.0@-590.55,-5905.51
  Bottom Layer w19.68: E169.0@-590.55,-5905.51 -541.34,-5856.3 -541.34,-5698.82 -452.76,-5610.24 E164.0@-295.28,-5610.24 -246.06,-5561.02 -246.06,-5403.54 -157.48,-5314.96 E158.0@0,-5314.96 49.21,-5265.75 49.21,-5108.27 137.8,-5019.69 E152.0@295.28,-5019.69 344.49,-4970.47 344.49,-4812.99 433.07,-4724.41 E146.0@590.55,-4724.41 ; E146.0@594.32,-4720.64 629.92,-4685.04 629.92,-4527.56 728.35,-4429.13 E138.0@885.83,-4429.13 925.2,-4389.76 925.2,-4232.28 1023.62,-4133.86 E130.0@1181.1,-4133.86 E121.0@1476.38,-3838.58
Row19: Designator18.19 E139.0 E147.0 E153.0 E159.0 E165.0 E170.0 E175.0 | length 9176.5
  Bottom Layer w10: Designator18.19@-6715.55,-7028.54 -4212.6,-7028.54 -1240.16,-7028.54 -1233.85,-7028.54 -1071.57,-7028.54 -729.65,-6686.63 -729.65,-6339.89 E175.0@-590.55,-6200.79
  Bottom Layer w19.68: E175.0@-590.55,-6200.79 E170.0@-295.28,-5905.51 E165.0@0,-5610.24 E159.0@295.28,-5314.96 E153.0@590.55,-5019.69 E147.0@885.83,-4724.41 E139.0@1181.1,-4429.13
Row20: Designator18.20 E154.0 E160.0 E166.0 E171.0 E176.0 E181.0 | length 8930.9
  Bottom Layer w10: Designator18.20@-6715.55,-7048.23 -4212.6,-7048.23 -1240.16,-7048.23 -1233.85,-7048.23 -1071.45,-7048.23 -715.65,-6692.43 -715.65,-6621.17 E181.0@-590.55,-6496.06
  Bottom Layer w19.68: E181.0@-590.55,-6496.06 -551.18,-6456.69 -551.18,-6309.06 -442.91,-6200.79 E176.0@-295.28,-6200.79 -255.91,-6161.42 -255.91,-6003.94 -157.48,-5905.51 E171.0@0,-5905.51 49.21,-5856.3 49.21,-5698.82 137.8,-5610.24 E166.0@295.28,-5610.24 ; E166.0@299.04,-5606.47 304.37,-5606.47 334.65,-5576.19 334.65,-5413.39 433.07,-5314.96 E160.0@590.55,-5314.96 629.92,-5275.59 629.92,-5127.95 738.19,-5019.69 E154.0@885.83,-5019.69
Row21: Designator18.21 E161.0 E167.0 E172.0 E177.0 E182.0 E187.0 E193.0 | length 8343
  Bottom Layer w10: Designator18.21@-6715.55,-7067.91 -4212.6,-7067.91 -1240.16,-7067.91 -1233.85,-7067.91 -906.37,-7067.91 -887.67,-7086.61 E193.0@-885.83,-7086.61
  Bottom Layer w19.68: E193.0@-885.83,-7086.61 E187.0@-590.55,-6791.34 E182.0@-295.28,-6496.06 E172.0@295.28,-5905.51 E167.0@590.55,-5610.24 E161.0@885.83,-5314.96
Row22: Designator18.22 E168.0 E173.0 E178.0 E183.0 E188.0 E194.0 E200.0 | length 8947.2
  Bottom Layer w10: Designator18.22@-6715.55,-7087.6 -4212.6,-7087.6 -1258.86,-7087.6 -1240.16,-7106.3 -1233.85,-7112.61 -970.19,-7376.27 -891.45,-7376.27 E200.0@-885.83,-7381.89
  Bottom Layer w19.68: E200.0@-885.83,-7381.89 E194.0@-590.55,-7086.61 -551.18,-7047.24 -551.18,-6879.92 -462.6,-6791.34 E188.0@-295.28,-6791.34 -255.91,-6751.97 -255.91,-6584.65 -167.32,-6496.06 E183.0@0,-6496.06 39.37,-6456.69 39.37,-6289.37 127.95,-6200.79 E178.0@295.28,-6200.79 334.65,-6161.42 334.65,-5994.09 423.23,-5905.51 E173.0@590.55,-5905.51 629.92,-5866.14 629.92,-5698.82 718.5,-5610.24 E168.0@885.83,-5610.24
Row23: Designator18.23 E174.0 E179.0 E184.0 E189.0 E195.0 E201.0 | length 8411.5
  Bottom Layer w10: Designator18.23@-6715.55,-7107.28 -4212.6,-7107.28 -1258.97,-7107.28 -1240.16,-7126.1 -1233.85,-7132.41 -975.99,-7390.27 -972.92,-7390.27 -878.94,-7484.25 -692.91,-7484.25 E201.0@-590.55,-7381.89
  Bottom Layer w19.68: E201.0@-590.55,-7381.89 E195.0@-295.28,-7086.61 E189.0@0,-6791.34 E184.0@295.28,-6496.06 E179.0@590.55,-6200.79 E174.0@885.83,-5905.51
Row24: Designator18.24 E180.0 E185.0 E190.0 E196.0 E202.0 E208.0 | length 8919.4
  Bottom Layer w10: Designator18.24@-6715.55,-7126.97 -4212.6,-7126.97 -1259.09,-7126.97 -1240.16,-7145.9 -1233.85,-7152.2 -905.32,-7480.73 -904.98,-7480.73 -708.55,-7677.17 E208.0@-590.55,-7677.17
  Bottom Layer w19.68: E208.0@-590.55,-7677.17 -551.18,-7637.8 -551.18,-7480.32 -452.76,-7381.89 E202.0@-295.28,-7381.89 -255.91,-7342.52 -255.91,-7185.04 -157.48,-7086.61 E196.0@0,-7086.61 59.06,-7027.56 59.06,-6860.24 127.95,-6791.34 E190.0@295.28,-6791.34 334.65,-6751.97 334.65,-6584.65 423.23,-6496.06 E185.0@590.55,-6496.06 639.76,-6446.85 639.76,-6279.53 718.5,-6200.79 E180.0@885.83,-6200.79
Row25: Designator18.25 E186.0 E191.0 E197.0 E203.0 E209.0 E215.0 | length 8649.5
  Bottom Layer w10: Designator18.25@-6715.55,-7146.65 -4212.6,-7146.65 -1259.2,-7146.65 -1240.16,-7165.7 -1233.85,-7172 -911.12,-7494.73 -910.78,-7494.73 -661.42,-7744.09 -661.42,-7905.44 -594.41,-7972.44 E215.0@-590.55,-7972.44
  Bottom Layer w19.68: E215.0@-590.55,-7972.44 E186.0@885.83,-6496.06
Row26: Designator18.26 E192.0 E198.0 E204.0 E210.0 E216.0 E222.0 | length 9395.6
  Bottom Layer w10: Designator18.26@-6715.55,-7166.34 -4212.6,-7166.34 -1260.83,-7166.34 -1240.16,-7187.01 -1233.85,-7193.32 -675.42,-7751.75 -675.42,-8194.66 -610.98,-8259.1 -607.12,-8259.1 -598.5,-8267.72 E222.0@-590.55,-8267.72
  Bottom Layer w19.68: E222.0@-590.55,-8267.72 -551.18,-8228.35 -551.18,-8070.87 -452.76,-7972.44 E216.0@-295.28,-7972.44 -255.91,-7933.07 -255.91,-7765.75 -167.32,-7677.17 E210.0@0,-7677.17 39.37,-7637.8 39.37,-7480.31 137.8,-7381.89 E204.0@295.28,-7381.89 334.65,-7342.52 334.65,-7185.04 433.07,-7086.61 E198.0@590.55,-7086.61 639.76,-7037.4 639.76,-6879.92 728.35,-6791.34 E192.0@885.83,-6791.34
Row27: Designator18.27 E199.0 E205.0 E211.0 E217.0 E223.0 E229.0 | length 9197.2
  Bottom Layer w10: Designator18.27@-6715.55,-7186.02 -6513.34,-7186.02 -4212.6,-7186.02 -1260.94,-7186.02 -1240.16,-7206.81 -1233.85,-7213.11 -689.42,-7757.55 -689.42,-8200.46 -688.98,-8200.9 -688.98,-8457.17 -590.55,-8555.59 E229.0@-590.55,-8562.99
  Bottom Layer w19.68: E229.0@-590.55,-8562.99 E223.0@-295.28,-8267.72 E217.0@0,-7972.44 E199.0@885.83,-7086.61
Row28: Designator18.28 E206.0 E212.0 E218.0 E224.0 E230.0 E236.0 | length 9939.3
  Bottom Layer w10: Designator18.28@-6715.55,-7205.71 -4212.6,-7205.71 -1261.81,-7205.71 -1240.16,-7227.36 -1233.85,-7233.67 -703.42,-7764.1 -703.42,-8462.52 -629.92,-8536.02 -629.92,-8818.9 E236.0@-590.55,-8858.27
  Bottom Layer w19.68: E236.0@-590.55,-8858.27 -551.18,-8818.9 -551.18,-8661.42 -452.76,-8562.99 E230.0@-295.28,-8562.99 -255.91,-8523.62 -255.91,-8366.14 -157.48,-8267.72 E224.0@0,-8267.72 39.37,-8228.35 39.37,-8070.87 137.8,-7972.44 E218.0@295.28,-7972.44 333.66,-7934.06 333.66,-7776.57 433.07,-7677.17 E212.0@590.55,-7677.17 629.92,-7637.8 629.92,-7470.47 718.5,-7381.89 E206.0@885.83,-7381.89
Row29: Designator18.29 E207.0 E213.0 E219.0 E225.0 E231.0 E237.0 | length 9979.6
  Bottom Layer w10: Designator18.29@-6715.55,-7225.39 -4212.6,-7225.39 -1261.93,-7225.39 -1240.16,-7247.16 -1233.85,-7253.47 -717.42,-7769.9 -717.42,-8468.32 -645.67,-8540.07 -645.67,-8913.39 -610.24,-8948.82 -385.83,-8948.82 E237.0@-295.28,-8858.27
  Bottom Layer w19.68: E237.0@-295.28,-8858.27 E231.0@0,-8562.99 E225.0@295.28,-8267.72 E219.0@590.55,-7972.44 E213.0@885.83,-7677.17 889.59,-7673.4 889.59,-7655.38 915.51,-7629.46 915.51,-7490 1023.62,-7381.89 E207.0@1181.1,-7381.89
Row30: Designator18.30 E214.0 E220.0 E226.0 E232.0 E238.0 E243.0 | length 10382.2
  Bottom Layer w10: Designator18.30@-6715.55,-7245.08 -4212.6,-7245.08 -1263.78,-7245.08 -1240.16,-7268.7 -1233.85,-7275.01 -731.42,-7777.44 -731.42,-8474.12 -659.67,-8545.87 -659.67,-8919.18 -425.31,-9153.54 E243.0@-295.28,-9153.54
  Bottom Layer w19.68: E243.0@-295.28,-9153.54 -255.91,-9114.17 -255.91,-8966.54 -147.64,-8858.27 E238.0@0,-8858.27 2.08,-8858.27 39.37,-8820.98 39.37,-8651.57 127.95,-8562.99 E232.0@295.28,-8562.99 334.65,-8523.62 334.65,-8366.14 433.07,-8267.72 E226.0@590.55,-8267.72 629.92,-8228.35 629.92,-8080.71 738.19,-7972.44 E220.0@885.83,-7972.44 915.51,-7942.76 915.51,-7785.28 1023.62,-7677.17 E214.0@1181.1,-7677.17
Row31: Designator18.31 E221.0 E227.0 E228.0 E233.0 E235.0 E239.0 E242.0 E244.0 E248.0 E249.0 | length 11586.3
  Bottom Layer w10: Designator18.31@-6715.55,-7264.76 -4212.6,-7264.76 -1263.89,-7264.76 -1240.16,-7288.5 -1233.85,-7294.81 -745.42,-7783.24 -745.42,-8479.92 -673.67,-8551.67 -673.67,-8924.98 -330.71,-9267.94 -330.71,-9413.39 E249.0@-295.28,-9448.82 ; E248.0@1181.1,-9153.54 1176.42,-9148.86 1176.42,-9123.99 1137.8,-9085.37 1137.8,-9007.87 1216.54,-8929.13 1216.54,-8893.7 E242.0@1181.1,-8858.27 1153.54,-8830.71 1153.54,-8728.35 1205.94,-8675.94 1205.94,-8587.83 E235.0@1181.1,-8562.99 1145.67,-8527.56 1145.67,-8452.76 1212.6,-8385.83 1212.6,-8299.21 E228.0@1181.1,-8267.72 1149.61,-8236.22 1149.61,-8129.92 1206.47,-8073.06 1206.47,-7997.81 E221.0@1181.1,-7972.44
  Bottom Layer w19.68: E249.0@-295.28,-9448.82 E244.0@0,-9153.54 E233.0@590.55,-8562.99 E227.0@885.83,-8267.72 935.04,-8218.5 935.04,-8100.39 1062.99,-7972.44 E221.0@1181.1,-7972.44
Row32: Designator18.32 E234.0 E240.0 E241.0 E245.0 E246.0 E247.0 E250.0 E251.0 E252.0 E253.0 | length 11772.5
  Bottom Layer w10: Designator18.32@-6715.55,-7284.45 -6637.8,-7284.45 -4212.6,-7284.45 -1265.75,-7284.45 -1240.16,-7310.04 -1233.85,-7316.35 -759.42,-7790.78 -759.42,-8485.72 -687.67,-8557.47 -687.67,-8930.78 -350.39,-9268.06 -350.39,-9496.06 -312.8,-9533.66 -84.84,-9533.66 E250.0@0,-9448.82
  Bottom Layer w19.68: E250.0@0,-9448.82 E245.0@295.28,-9153.54 330.71,-9188.98 330.71,-9295.28 251.97,-9374.02 251.97,-9417.32 255.83,-9417.32 287.33,-9448.82 E251.0@295.28,-9448.82 E252.0@590.55,-9448.82 641.73,-9397.64 641.73,-9358.27 543.31,-9259.84 543.31,-9200.79 E246.0@590.55,-9153.54 637.8,-9106.3 637.8,-9082.68 543.31,-8988.19 543.31,-8905.51 E240.0@590.55,-8858.27 E234.0@885.83,-8562.99 910.67,-8587.83 910.67,-8691.69 860.98,-8741.38 860.98,-8842.34 866.84,-8848.2 867.81,-8848.2 877.88,-8858.27 E241.0@885.83,-8858.27 933.07,-8905.51 933.07,-8948.82 850.39,-9031.5 850.39,-9118.11 E247.0@885.83,-9153.54 893.77,-9153.54 902.39,-9162.16 906.26,-9162.16 929.13,-9185.04 929.13,-9216.54 838.58,-9307.09 838.58,-9401.57 E253.0@885.83,-9448.82
pads on no net: Designator18.43 Designator18.44 Designator18.45 Designator18.46 Designator18.47 Designator18.48 Designator18.49 Designator18.50 Designator18.51 Designator18.52 Designator18.53 Designator18.54 Designator18.55 Designator18.56 Designator18.57 Designator18.58 Designator18.59 Designator18.60 Designator18.61 Designator18.62 Designator18.63 Designator18.64

## Silkscreen, mask and mechanical layers (free items; w line width, h text height)
Mechanical 13:
  lines w3.94: -1244.89,-5582.15 cw(c8166.31,-3378.54) -1476.36,-4045.95 -1476.36,-3534.14 -1476.36,-3140.44 -1476.36,-2864.85 cw(c7311.44,-3944.72) -1313.08,-1942.41 cw(c3918.93,-3341.98) -645.19,-426.24 cw(c298.66,-974.06) -512.56,-244.08 cw(c175.46,-757.6) -401.59,-121.92 cw(c543.89,-896.94) -242,39.53 cw(c485.96,-656.22) 835.98,287.96 cw(c52.22,-1175.58) 1685.24,-876.42 cw(c-3527.58,-2337.08) 1819.32,-3184.24 cw(c-4531.03,-1475.13) 1426.2,-4260.7 ccw(c3666.75,-5584.92) 1074.31,-5814.86 ccw(c5587.75,-5713.61) 1240.88,-6932.71 ccw(c4856.21,-6611.73) 1331.49,-7477.73 cw(c-856.55,-8039.02) 1394.08,-7846.04 cw(c-1473.17,-8345.15) 1304.04,-9215.4 ; -1243,-5582.02 cw(c-7729.36,-7029.93) -1094.5,-6645.36 cw(c-1101.93,-6646.9) -1100.39,-6654.33 -6749.02,-6654.33 -6749.02,-6664.33 -6749.02,-7924.29 -6749.02,-7933.46 -1031.5,-7933.46 cw(c-1029.84,-7969.22) -994.08,-7967.56 cw(c-12790.9,-8516.5) -984.15,-8257.65 ccw(c1754.38,-8132.87) -718.36,-9316.36 ccw(c255.92,-8809.73) 531.51,-9872.72 ccw(c65,-8526.05) 1274.97,-9279.14 ccw(c1117.99,-9169.77) 1303.8,-9215.35
Mechanical 15:
  lines w3.94: -6748.9,-7933.39 -6547.24,-7933.39 -6547.24,-6654.41 -6748.9,-6654.41 -6748.9,-7933.39